# Altium PCB PCB1.PcbDoc
Units mil, origin at the board's own origin, x right, y up, seen from the top; angles counter-clockwise.
Board outline 6330 x 8590 mil, 2 copper layers (Top Layer, Bottom Layer); 40 components, 54 nets, 149 pads, 0 vias.
Unrouted connection lines stored in the file: 60.
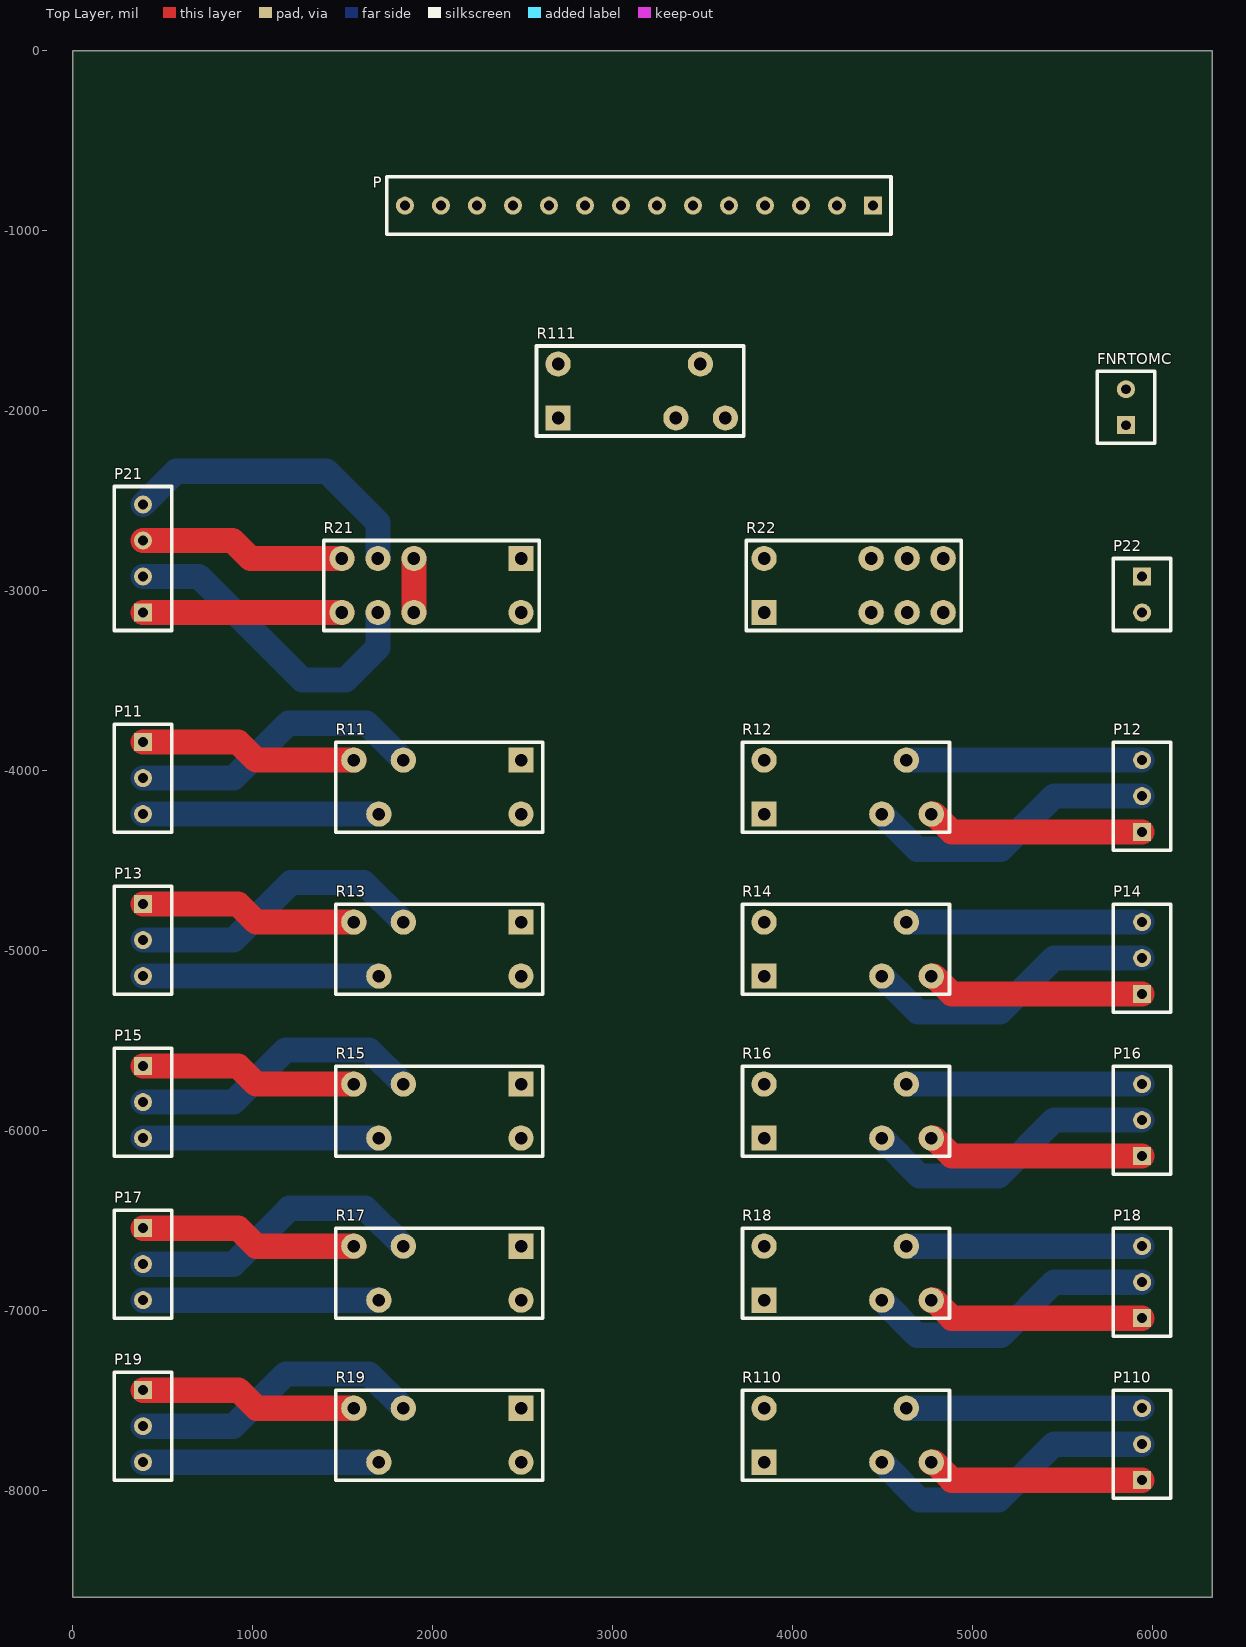
[diagram p0: Top Layer view]
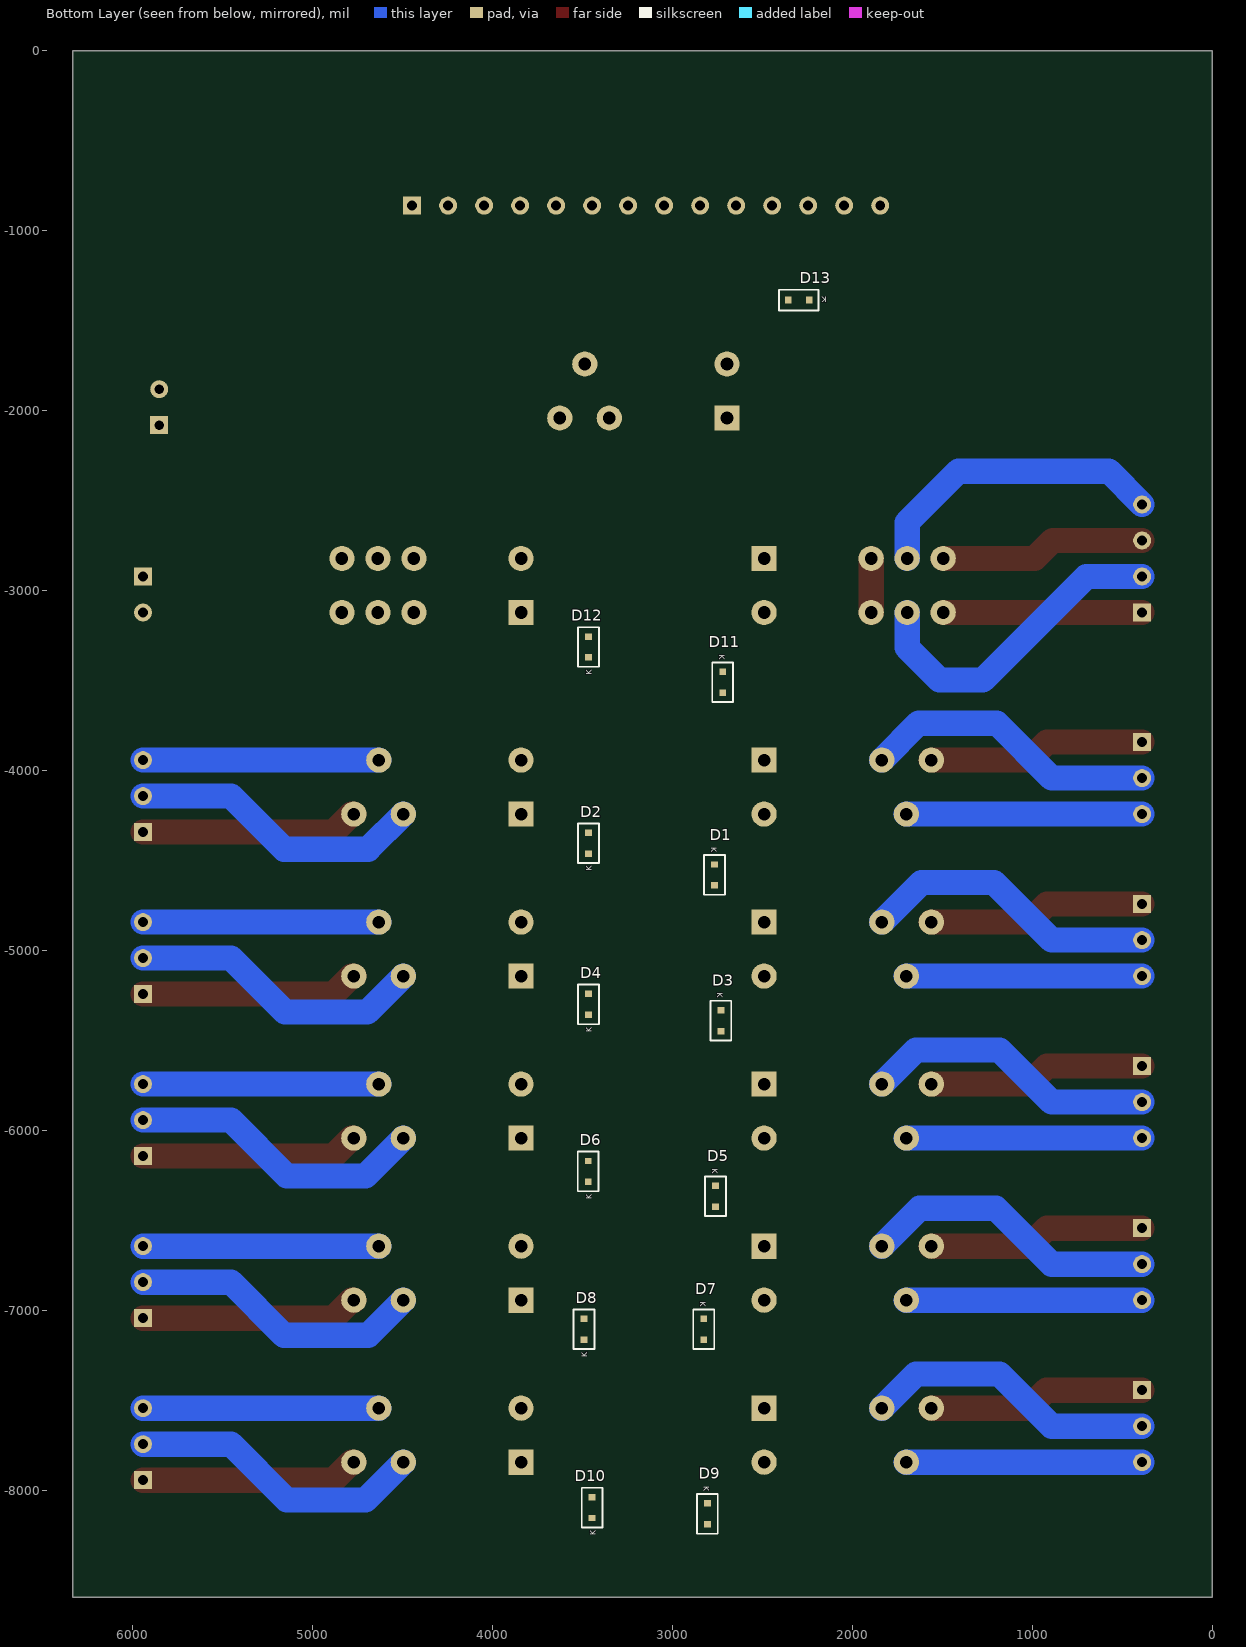
[diagram p1: Bottom Layer view, seen from below]

## Layer stack, top to bottom
Top Solder: solder mask 0.4, Solder Resist, Dk 3.5
Top Layer: signal copper 1.4
Dielectric 1: dielectric 12.6, FR-4, Dk 4.8
Bottom Layer: signal copper 1.4
Bottom Solder: solder mask 0.4, Solder Resist, Dk 3.5

## Board outline
0,-8590 6330,-8590 6330,0 0,0

## Design rules (kind name [scope] priority, off if disabled: settings)
Clearance [All] p1: gap=50 ignorepadtopadclearanceinfootprint=FALSE
PolygonConnect [All] p1: connectstyle=Relief reliefconductorwidth=10 reliefentries=4 polygonreliefangle="90 Angle" airgapwidth=10
RoutingVias [All] p1: holewidth=60 width=100 viastyle="Through Hole" minholewidth=60 minwidth=100 maxholewidth=60 maxwidth=100
SolderMaskExpansion [All] p1: expansion=4 istentingtop=FALSE
Width [All] p1: maxlimit=150 minlimit=50 preferedwidth=140 minimp=50.000000 maximp=50.000000 favimp=50.000000
30 further rules are at their usual default settings.

## Components (designator, comment, footprint, x,y, rotation, side; value= is the part's Value field where it differs from the comment)
D1 "DiodeFLY" DiodeFLY 2788,-4498 r270 bottom
D2 "DiodeFLY" DiodeFLY 3442,-4482 r90 bottom
D3 "DiodeFLY" DiodeFLY 2753,-5307 r270 bottom
D4 "DiodeFLY" DiodeFLY 3442,-5377 r90 bottom
D5 "DiodeFLY" DiodeFLY 2783,-6283 r270 bottom
D6 "DiodeFLY" DiodeFLY 3444,-6305 r90 bottom
D7 "DiodeFLY" DiodeFLY 2848,-7022 r270 bottom
D8 "DiodeFLY" DiodeFLY 3467,-7182 r90 bottom
D9 "DiodeFLY" DiodeFLY 2828,-8047 r270 bottom
D10 "DiodeFLY" DiodeFLY 3422,-8172 r90 bottom
D11 "DiodeFLY" DiodeFLY 2743,-3428 r270 bottom
D12 "DiodeFLY" DiodeFLY 3442,-3392 r90 bottom
D13 "DiodeFLY" DiodeFLY 2217,-1362 r0 bottom
FNRTOMC "Header 2" HDR2 5850,-2180 r90 top
P "MHDR1X14" HDR14 4545,-860 r180 top
P11 "Header 3" HDR3 390,-3740 r270 top
P12 "Header 3" HDR3 5940,-4440 r90 top
P13 "Header 3" HDR3 390,-4640 r270 top
P14 "Header 3" HDR3 5940,-5340 r90 top
P15 "Header 3" HDR3 390,-5540 r270 top
P16 "Header 3" HDR3 5940,-6240 r90 top
P17 "Header 3" HDR3 390,-6440 r270 top
P18 "Header 3" HDR3 5940,-7140 r90 top
P19 "Header 3" HDR3 390,-7340 r270 top
P21 "Header 4" HDR4 390,-3220 r90 top
P22 "Header 2" HDR2 5940,-2820 r270 top
P110 "Header 3" HDR3 5940,-8040 r90 top
R11 "OnePR" EENPOOL 2490,-4090 r180 top
R12 "OnePR" EENPOOL 3840,-4090 r0 top
R13 "OnePR" EENPOOL 2490,-4990 r180 top
R14 "OnePR" EENPOOL 3840,-4990 r0 top
R15 "OnePR" EENPOOL 2490,-5890 r180 top
R16 "OnePR" EENPOOL 3840,-5890 r0 top
R17 "OnePR" EENPOOL 2490,-6790 r180 top
R18 "OnePR" EENPOOL 3840,-6790 r0 top
R19 "OnePR" EENPOOL 2490,-7690 r180 top
R21 "TwoPR" TWEEPOOL 1695,-2970 r180 top
R22 "TwoPR" TWEEPOOL 4635,-2970 r0 top
R110 "OnePR" EENPOOL 3840,-7690 r0 top
R111 "OnePR" EENPOOL 2696,-1890 r0 top

## Footprints (in the part's own frame and the unit in brackets; to place one, negate y for a bottom-side part, rotate by r counter-clockwise, add the part's x,y. Pads: shape width x height; smd on the part's side, far side on the other; paste and mask are expansions set on the pad)
DiodeFLY [mil]
  rect 36x38 smd: 1(22,23) 2(138,23)
  silkscreen extent -30,-35 190,81
EENPOOL [mil]
  rect 140x140 hole 70: 1(0,-150)
  round 140 hole 70: 2(0,150) 3(790,150) 4(654,-150) 5(929,-150)
  silkscreen extent -120,-250 1030,250
HDR2 [mil]
  rect 100x100 hole 55: 1(100,0)
  round 100 hole 55: 2(300,0)
  silkscreen extent 0,-160 400,160
HDR3 [mil]
  rect 100x100 hole 55: 1(100,0)
  round 100 hole 55: 2(300,0) 3(500,0)
  silkscreen extent 0,-160 600,160
HDR4 [mil]
  rect 100x100 hole 55: 1(100,0)
  round 100 hole 55: 2(300,0) 3(500,0) 4(700,0)
  silkscreen extent 0,-160 800,160
HDR14 [mil]
  rect 100x100 hole 55: 1(100,0)
  round 100 hole 55: 2(300,0) 3(500,0) 4(700,0) 5(900,0) 6(1100,0) 7(1300,0) 8(1500,0) 9(1700,0) 10(1900,0) 11(2100,0) 12(2300,0) 13(2500,0) 14(2700,0)
  silkscreen extent 0,-160 2800,160
TWEEPOOL [mil]
  rect 140x140 hole 70: 1(-795,-150)
  round 140 hole 70: 2(-795,150) 3(-200,-150) 4(0,-150) 5(200,-150) 6(-200,150) 7(0,150) 8(200,150)
  silkscreen extent -895,-250 300,250

## Part data
FNRTOMC P22: "Header, 2-Pin", LatestRevisionDate=17-Jul-2002, LatestRevisionNote="Re-released for DXP Platform.", Publisher="Altium Limited"
P: "Header, 14-Pin", LatestRevisionDate=17-Jul-2002, LatestRevisionNote="Re-released for DXP Platform.", Publisher="Altium Limited"
P11 P12 P13 P14 P15 P16 P17 P18 P19 P110: "Header, 3-Pin", LatestRevisionDate=17-Jul-2002, LatestRevisionNote="Re-released for DXP Platform.", Publisher="Altium Limited"
P21: "Header, 4-Pin", LatestRevisionDate=17-Jul-2002, LatestRevisionNote="Re-released for DXP Platform.", Publisher="Altium Limited"
R11 R12 R13 R14 R15 R16 R17 R18 R19 R110 R111: library part R1
R21 R22: library part R2

## Nets (pads, with @x,y where several pads share a name; then routed paths per layer and width w, separated by ;. In a path a pad name is that pad's centre, name@x,y a point inside that pad or via, vN(x,y) a via of type N, cw(c..) or ccw(c..) an arc to the next point about the centre after c; other vN are vias at no path point)
NetD1_1: D1.1 P.3 R11.1
NetD1_2: D1.2 D2.2 D3.2 D4.2 D5.2 D6.2 D7.2 D8.2 D9.2 D10.2 D11.2 D12.2 D13.2 P.1 R11.2 R12.2 R13.2 R14.2 R15.2 R16.2 R17.2 R18.2 R19.2 R21.2 R22.2 R110.2 R111.2
NetD2_1: D2.1 P.2 R12.1
NetD3_1: D3.1 P.4 R13.1
NetD4_1: D4.1 P.5 R14.1
NetD5_1: D5.1 P.9 R15.1
NetD6_1: D6.1 P.10 R16.1
NetD7_1: D7.1 P.11 R17.1
NetD8_1: D8.1 P.12 R18.1
NetD9_1: D9.1 P.13 R19.1
NetD10_1: D10.1 P.14 R110.1
NetD11_1: D11.1 P.6 R21.1
NetD12_1: D12.1 P.7 R22.1
NetD13_1: D13.1 P.8 R111.1
NetFNRTOMC_1: FNRTOMC.1 R22.3 R111.5
NetFNRTOMC_2: FNRTOMC.2 R22.6 R111.4
NetP11_1: P11.1 R11.5 | length 1212.4
  Top Layer w140: P11.1 918.73,-3840 1018.73,-3940 R11.5
NetP11_2: P11.2 R11.4 | length 1657.2
  Bottom Layer w140: P11.2 892.59,-4040 1197.59,-3735 1631,-3735 R11.4
NetP11_3: P11.3 R11.3 | length 1310
  Bottom Layer w140: P11.3 R11.3
NetP12_1: P12.1 R12.5 | length 1212.4
  Top Layer w140: R12.5 4782.53,-4240 4882.53,-4340 P12.1
NetP12_2: P12.2 R12.4 | length 1649
  Bottom Layer w140: R12.4 4689,-4435 5156.47,-4435 5451.47,-4140 P12.2
NetP12_3: P12.3 R12.3 | length 1310
  Bottom Layer w140: R12.3 P12.3
NetP13_1: P13.1 R13.5 | length 1212.4
  Top Layer w140: P13.1 918.73,-4740 1018.73,-4840 R13.5
NetP13_2: P13.2 R13.4 | length 1669.7
  Bottom Layer w140: P13.2 892.59,-4940 1212.59,-4620 1616,-4620 R13.4
NetP13_3: P13.3 R13.3 | length 1310
  Bottom Layer w140: P13.3 R13.3
NetP14_1: P14.1 R14.5 | length 1212.4
  Top Layer w140: R14.5 4782.53,-5140 4882.53,-5240 P14.1
NetP14_2: P14.2 R14.4 | length 1653.1
  Bottom Layer w140: R14.4 4694,-5340 5151.47,-5340 5451.47,-5040 P14.2
NetP14_3: P14.3 R14.3 | length 1310
  Bottom Layer w140: R14.3 P14.3
NetP15_1: P15.1 R15.5 | length 1212.4
  Top Layer w140: P15.1 918.73,-5640 1018.73,-5740 R15.5
NetP15_2: P15.2 R15.4 | length 1644.8
  Bottom Layer w140: P15.2 892.59,-5840 1182.59,-5550 1646,-5550 R15.4
NetP15_3: P15.3 R15.3 | length 1310
  Bottom Layer w140: P15.3 R15.3
NetP16_1: P16.1 R16.5 | length 1212.4
  Top Layer w140: R16.5 4782.53,-6040 4882.53,-6140 P16.1
NetP16_2: P16.2 R16.4 | length 1661.4
  Bottom Layer w140: R16.4 4704,-6250 5141.47,-6250 5451.47,-5940 P16.2
NetP16_3: P16.3 R16.3 | length 1310
  Bottom Layer w140: R16.3 P16.3
NetP17_1: P17.1 R17.5 | length 1212.4
  Top Layer w140: P17.1 918.73,-6540 1018.73,-6640 R17.5
NetP17_2: P17.2 R17.4 | length 1661.4
  Bottom Layer w140: P17.2 892.59,-6740 1202.59,-6430 1626,-6430 R17.4
NetP17_3: P17.3 R17.3 | length 1310
  Bottom Layer w140: P17.3 R17.3
NetP18_1: P18.1 R18.5 | length 1212.4
  Top Layer w140: R18.5 4782.53,-6940 4882.53,-7040 P18.1
NetP18_2: P18.2 R18.4 | length 1649
  Bottom Layer w140: R18.4 4689,-7135 5156.47,-7135 5451.47,-6840 P18.2
NetP18_3: P18.3 R18.3 | length 1310
  Bottom Layer w140: R18.3 P18.3
NetP19_1: P19.1 R19.5 | length 1212.4
  Top Layer w140: P19.1 921.23,-7440 1021.23,-7540 R19.5
NetP19_2: P19.2 R19.4 | length 1644.8
  Bottom Layer w140: P19.2 892.59,-7640 1182.59,-7350 1646,-7350 R19.4
NetP19_3: P19.3 R19.3 | length 1310
  Bottom Layer w140: P19.3 R19.3
NetP21_1: P21.1 R21.8 | length 1105
  Top Layer w140: P21.1 R21.8
NetP21_2: P21.2 R21.7 | length 1812.7
  Bottom Layer w140: P21.2 700,-2920 1275,-3495 1515,-3495 1695,-3315 R21.7
NetP21_3: P21.3 R21.5 | length 1146.4
  Top Layer w140: P21.3 887.09,-2720 987.09,-2820 R21.5
NetP21_4: P21.4 R21.4 | length 1699.7
  Bottom Layer w140: P21.4 575,-2335 1410,-2335 1695,-2620 R21.4
NetP22_1: P22.1 R22.7
NetP22_2: P22.2 R22.4
NetP110_1: P110.1 R110.5 | length 1212.4
  Top Layer w140: R110.5 4782.53,-7840 4882.53,-7940 P110.1
NetP110_2: P110.2 R110.4 | length 1661.4
  Bottom Layer w140: R110.4 4704,-8050 5141.47,-8050 5451.47,-7740 P110.2
NetP110_3: P110.3 R110.3 | length 1310
  Bottom Layer w140: R110.3 P110.3
NetR21_3: R21.3 R21.6 | length 300
  Top Layer w140: R21.6 R21.3
NetR22_5: R22.5 R22.8 R111.3

## Text inside footprints (layer, text, board x,y; h text height)
D1: Bottom Overlay "K" at 2784,-4424 h30 r90
D2: Bottom Overlay "K" at 3446,-4556 h30 r270
D3: Bottom Overlay "K" at 2749,-5233 h30 r90
D4: Bottom Overlay "K" at 3446,-5451 h30 r270
D5: Bottom Overlay "K" at 2779,-6209 h30 r90
D6: Bottom Overlay "K" at 3448,-6379 h30 r270
D7: Bottom Overlay "K" at 2844,-6948 h30 r90
D8: Bottom Overlay "K" at 3471,-7256 h30 r270
D9: Bottom Overlay "K" at 2824,-7973 h30 r90
D10: Bottom Overlay "K" at 3426,-8246 h30 r270
D11: Bottom Overlay "K" at 2739,-3354 h30 r90
D12: Bottom Overlay "K" at 3446,-3466 h30 r270
D13: Bottom Overlay "K" at 2143,-1366 h30 r180